# Altium PCB Opioid - rev.A0.PcbDoc
Units mm, origin at the board's own origin, x right, y up, seen from the top; angles counter-clockwise.
Board outline 35 x 35.1 mm, 2 copper layers (Top Layer, Bottom Layer), stack 0.871 mm thick; 51 components, 56 nets, 257 pads, 138 vias.
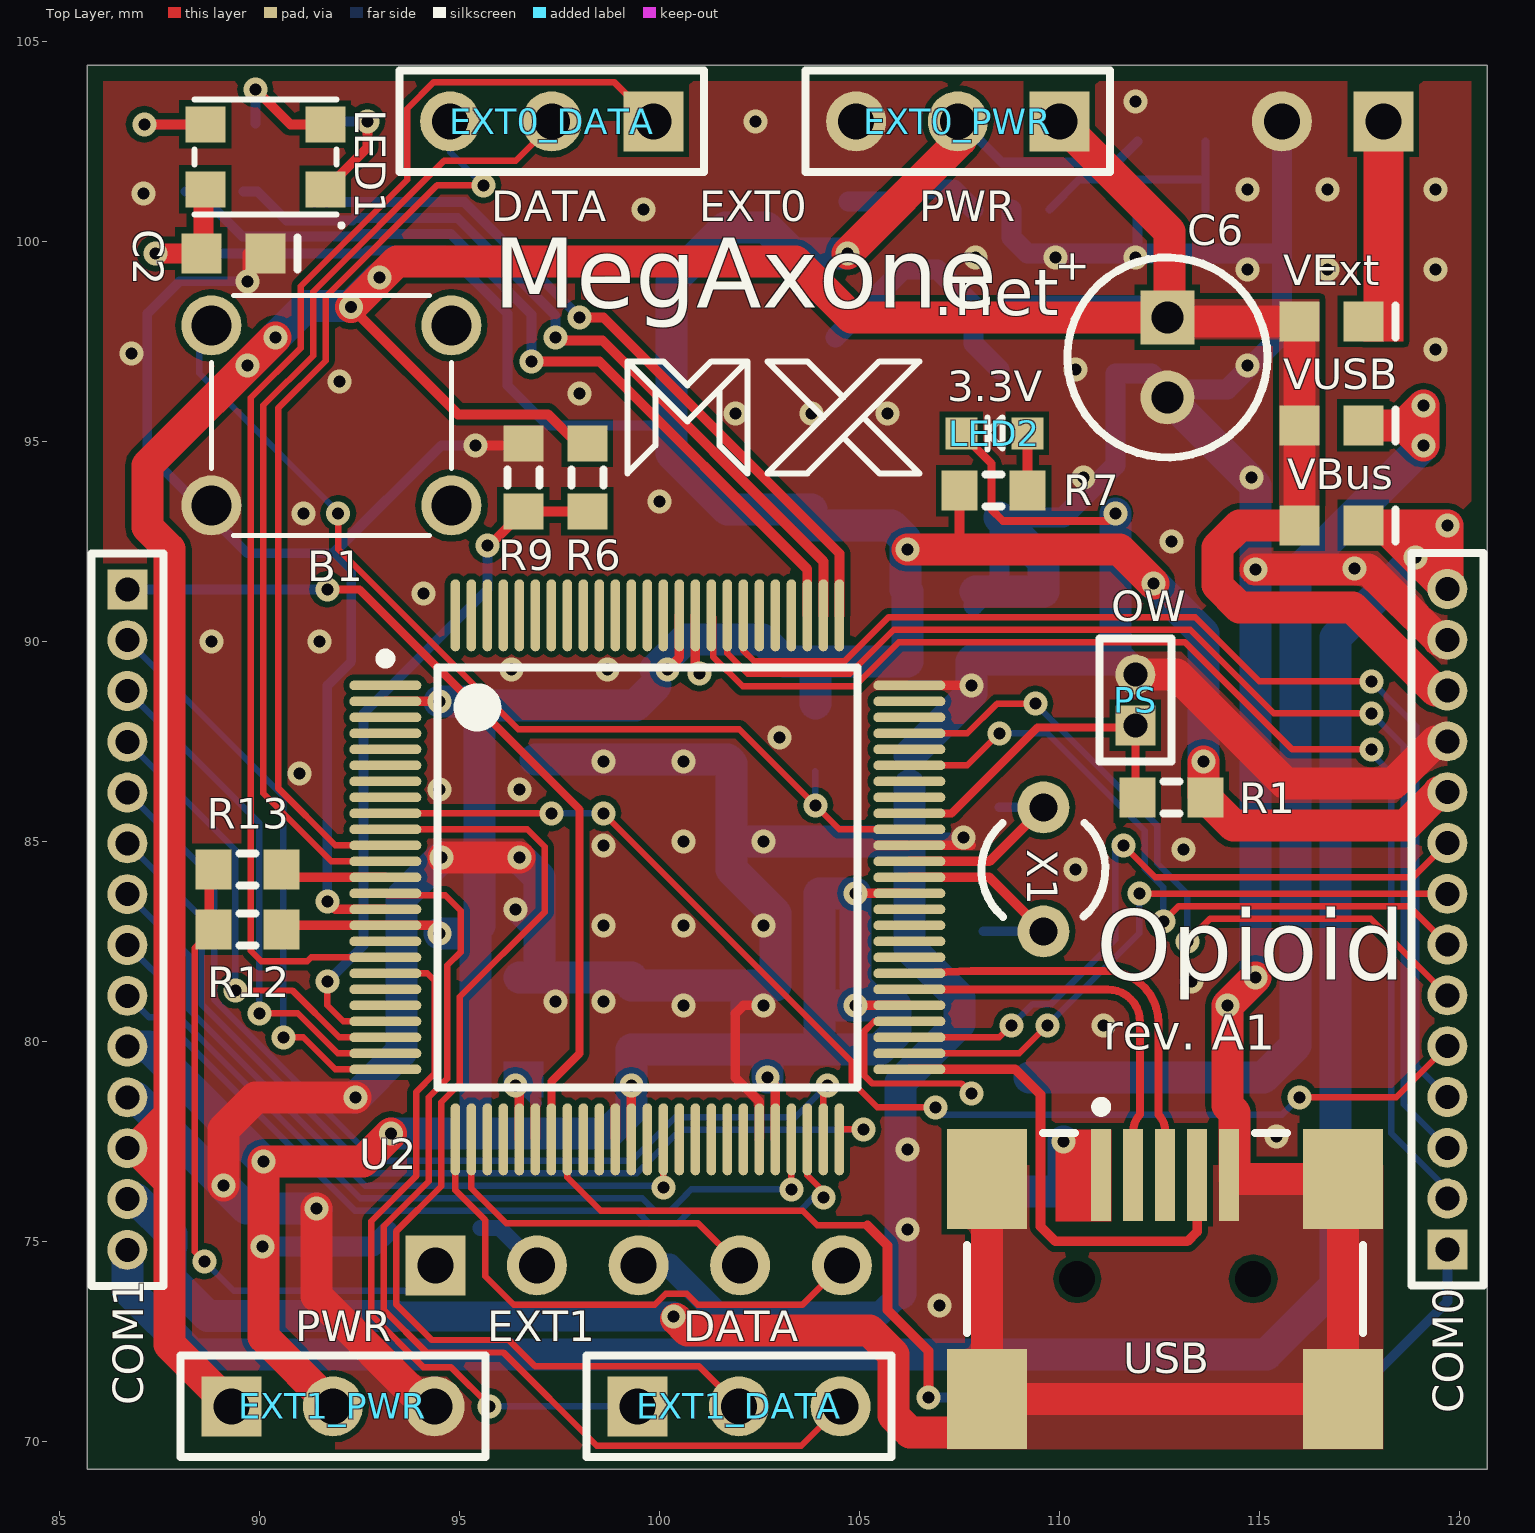
[diagram p0: Top Layer view]
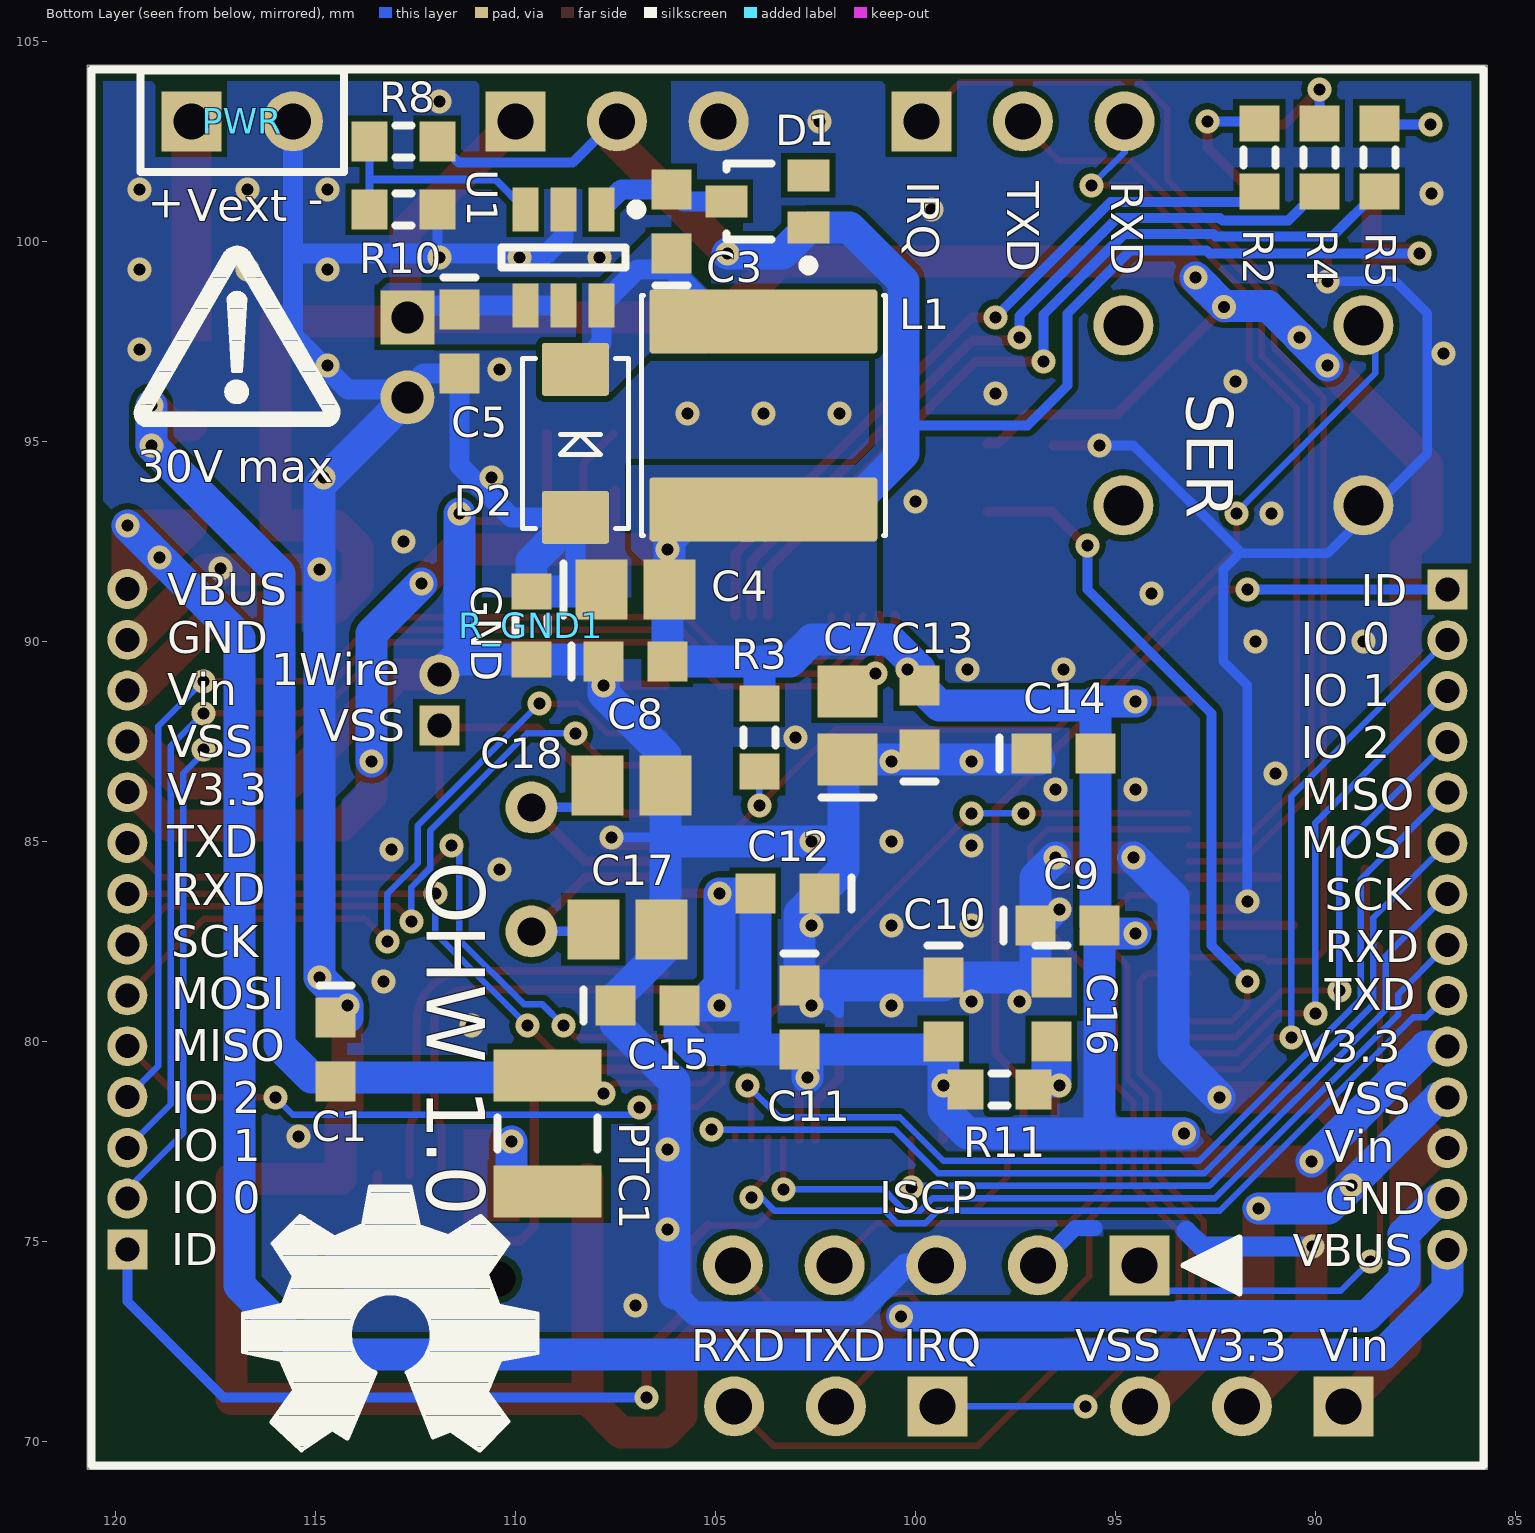
[diagram p1: Bottom Layer view, seen from below]

## Layer stack, top to bottom
Top Layer: signal copper 0.0356
Dielectric: core 0.8, FR-4, Dk 4.8
Bottom Layer: signal copper 0.0356

## Board outline
120.7,69.3 120.7,104.4 85.7,104.4 85.7,69.3

## Design rules (kind name [scope] priority, off if disabled: settings)
Clearance [All] p1: gap=0.152
DiffPairsRouting [All] p1: maxlimit=0.254 minlimit=0.254 mostfreqgap=0.254 maxuncoupledlength=12.7
HoleSize [All] p1: absolutevalues=TRUE maxlimit=6.3 minlimit=0.3 maxpercent=80.000 minpercent=20.000
HoleToHoleClearance [All] p1: gap=0.152 allowstackedmicrovias=TRUE
MinimumSolderMaskSliver [All] p1: minsoldermaskwidth=0.1
PlaneConnect [All] p1: planeconnectstyle=Direct reliefexpansion=0.508 reliefentries=4 reliefconductorwidth=0.254 reliefairgap=0.254
PolygonConnect [All] p1: connectstyle=Direct reliefconductorwidth=0.254 reliefentries=4 polygonreliefangle="90 Angle"
RoutingVias [All] p1: holewidth=3 width=0.6 viastyle="Through Hole" minholewidth=0.3 minwidth=0.6 maxholewidth=6.3 maxwidth=7
SilkToSilkClearance [All] p1: silktosilkclearance=0.1
SilkscreenOverComponentPads [All] p1: minsilkscreentomaskgap=0.1
SolderMaskExpansion TQFP [HasFootprint('TQFP-PT100_N')] p1: expansion=0.1
SolderMaskExpansion SolderMaskExpansion_1 [All] p2: expansion=0.05
Width [All] p1: maxlimit=12.7 minlimit=0.152 preferedwidth=0.152
21 further rules are at their usual default settings.

## Classes and differential pairs
component class uC: U2
component class Power: C3 C4 C5 C6 C7 C8 C9 C10 C11 C12 C13 C14 C15 C16 D1 D2 L1 LED2 R6 R7 R8 R9 R10 R11 R12 R13 R_GND1 U1 VBus VExt VUSB X1
component class IO: B1 C1 C2 COM0 COM1 EXT0_DATA EXT0_PWR EXT1_DATA EXT1_PWR LED1 PS PTC1 PWR R1 R2 R3 R4 R5
differential pair USB_D: +USB_D_P -USB_D_N

## Components (designator, comment, footprint, x,y, rotation, side; value= is the part's Value field where it differs from the comment)
B1 "Tact Button NO" "Tact TH 4pin 6×6mm" 88.3,93.4 r0 top
C1 "1µF" CAPC1608N 114.5,79.8 r270 bottom
C2 "1µF" CAPC1608N 89.35,99.7 r180 top
C3 "100nF" CAPC1608N 106.1,100.5 r90 bottom
C4 "10µF" CAPC2012N 107,91.3 r180 bottom
C5 "100nF" CAPC1608N 111.4,97.5 r270 bottom
C6 "33µF" CAPPR2-5x11 112.7,97.1 r270 top
C7 "10µF" CAPC2012N 101.7,87.9 r90 bottom
C8 "1µF" CAPC1608N 107,89.5 r180 bottom
C9 "100nF" CAPC1608N 96.2,82.9 r180 bottom
C10 "100nF" CAPC1608N 99.3,80.8 r270 bottom
C11 "100nF" CAPC1608N 102.9,80.6 r270 bottom
C12 "100nF" CAPC1608N 103.2,83.7 r0 bottom
C13 "100nF" CAPC1608N 99.9,88.1 r90 bottom
C14 "100nF" CAPC1608N 96.3,87.2 r180 bottom
C15 "100nF" CAPC1608N 106.7,80.9 r180 bottom
C16 "100nF" CAPC1608N 96.6,80.8 r270 bottom
COM0 "MHDR1X14" MHDR1X14 119.7,74.8 r90 top
COM1 "MHDR1X14" MHDR1X14 86.7,91.3 r270 top
D1 "Diode" SOT323 103.7,101 r90 bottom
D2 "Schottky Diode" DO-214AC 108.5,93.1 r270 bottom
EXT0_DATA "Header 3" HDR1X3 99.85,103 r180 top
EXT0_PWR "Header 3" HDR1X3 110,103 r180 top
EXT1_DATA "Header 3" HDR1X3 99.45,70.875 r0 top
EXT1_PWR "Header 3" HDR1X3 89.3,70.875 r0 top
L1 "15µH" "INDUCTOR 6×6mm Taiyo Yuden" 103.8,98 r270 bottom
LED1 "LED RGB common A" "LED 3528m" 91.4,102.9 r270 top
LED2 "" "LED 1608m" 109.2,95.2 r90 top
PS "MHDR1X2" MHDR1X2 111.9,87.9 r90 top
PTC1 "500mA" RESC3225N 109.2,77.7 r90 bottom
PWR "Header 2" HDR1X2 118.1,103 r180 bottom
R1 "4.7K" RESC1608N 112.8,86.1 r0 top
R2 "470" RESC1608N 91.4,102.1 r270 bottom
R3 "100K" RESC1608N 103.9,87.6 r90 bottom
R4 "330" RESC1608N 89.9,102.1 r270 bottom
R5 "330" RESC1608N 88.4,102.1 r270 bottom
R6 "10K" RESC1608N 98.2,94.1 r90 top
R7 "330" RESC1608N 108.359,93.766 r0 top
R8 "30.9K" RESC1608N 112.8,102.5 r180 bottom
R9 "1K" RESC1608N 96.6,94.1 r270 top
R10 "10K" RESC1608N 112.8,100.8 r0 bottom
R11 "10" RESC1608N 97.9,78.8 r0 bottom
R12 "150K" RESC1608N 89.7,82.8 r0 top
R13 "470" RESC1608N 89.7,84.3 r180 top
R_GND1 "0" RESC1608N 109.6,90.4 r270 bottom
U1 "MCP16301" SOT23-6_N 108.8,99.6 r270 bottom
U2 "PIC32MX575F256L" TQFP-PT100_N 99.7,84.1 r0 top
VBus "150" INDC1608N 116.8,92.9 r180 top
VExt "150" INDC1608N 116.8,98 r180 top
VUSB "150" INDC1608N 116.8,95.4 r180 top
X1 "Crystal" BCY-W2/D3.1 109.6,84.3 r0 top

## Footprints (in the part's own frame and the unit in brackets; to place one, negate y for a bottom-side part, rotate by r counter-clockwise, add the part's x,y. Pads: shape width x height; smd on the part's side, far side on the other; paste and mask are expansions set on the pad)
BCY-W2/D3.1 [mm] "Crystal, Thru-Hole; 2 Leads; Body 3.1 x 8.2 mm (Dia.xH)"
  round 1.3 hole 0.7: 1(0,1.55) 2(0,-1.55)
  silkscreen extent -1.55,-1.19 1.55,1.17
CAPC1608N [mm] "Chip Capacitor, Body 1.6x0.8mm, IPC Medium Density"
  rect 1x1 smd: 1(-0.8,0) 2(0.8,0)
  silkscreen extent -1.6,-0.4 -1.6,0.4, body extent -0.87,-0.48 0.87,0.48, height 0.85
CAPC2012N [mm] "Chip Capacitor, Body 2.0x1.3mm, IPC Medium Density"
  rect 1.3x1.5 smd: 1(-0.85,0) 2(0.85,0)
  silkscreen extent -1.8,-0.65 -1.8,0.65, body extent -1.1,-0.72 1.1,0.72, height 1.1
CAPPR2-5x11 [mm] "Capacitor, Electrolytic, Radial; Body 5 x 11 mm (Dia.xH typ); Pin Spacing 2 mm (typ)"
  rect 1.35x1.35 hole 0.8: 1(-1,0)
  round 1.35 hole 0.8: 2(1,0)
  silkscreen extent -2.5,-2.5 2.5,2.5
DO-214AC [mm] "DO-214AC Diode 4.25×2.65mm"
  rrect10% 1.32x1.68 smd: A(0,0) K(-3.7,0)
  silkscreen extent -3.98,-1.33 0.28,1.33, body extent -3.98,-1.33 0.28,1.33, height 2.15
HDR1X2 [mm] "Connector; Header; 2 Position"
  rect 1.5x1.5 hole 0.9: 1(0,0)
  round 1.5 hole 0.9: 2(2.54,0)
  silkscreen extent -1.27,-1.27 3.81,1.27
HDR1X3 [mm] "Connector; Header; 3 Position"
  rect 1.5x1.5 hole 0.9: 1(0,0)
  round 1.5 hole 0.9: 2(2.54,0) 3(5.08,0)
  silkscreen extent -1.27,-1.27 6.35,1.27
INDC1608N [mm] "Chip Inductor, Body 1.6x0.8mm, IPC Medium Density"
  rect 1x1 smd: 1(-0.8,0) 2(0.8,0)
  silkscreen extent -1.6,-0.4 -1.6,0.4, body extent -0.87,-0.48 0.87,0.48, height 0.71
"INDUCTOR 6×6mm Taiyo Yuden" [mm] "Inductor 6×6mm body Taiyo Yuden SMD Power"
  rrect10% 1.6x5.7 smd: 1(0,0) 2(4.7,0)
  silkscreen extent -0.65,-3.05 5.35,3.05, body extent -0.63,-2.99 5.35,2.99, height 2.8
"LED 1608m" [mm] "LED 1608 1.6x0.8mm"
  rect 0.8x0.8 smd: 1(0,0) 2(0,1.65)
  silkscreen extent -0.4,0.62 0.4,1, body extent -0.4,0.03 0.4,1.63, height 0.75
"LED 3528m" [mm] "LED RGB 3528m common A"
  rect 0.9x1 smd: 1(1.6,0.25) 2(1.6,-2.75) 3(-0.025,-2.75) 4(-0.025,0.25)
  silkscreen extent -0.65,-3.03 2.52,0.68, body extent -0.65,-3.03 2.22,0.53, height 1.9
MHDR1X2 [mm] "Connector; Header; 2 Position"
  rect 1x1 hole 0.6: 1(0,0)
  round 1 hole 0.6: 2(1.27,0)
  silkscreen extent -0.9,-0.9 2.17,0.9
MHDR1X14 [mm] "Connector; Header; 14 Position"
  rect 1x1 hole 0.6: 1(0,0)
  round 1 hole 0.6: 2(1.27,0) 3(2.54,0) 4(3.81,0) 5(5.08,0) 6(6.35,0) 7(7.62,0) 8(8.89,0) 9(10.16,0) 10(11.43,0) 11(12.7,0) 12(13.97,0) 13(15.24,0) 14(16.51,0)
  silkscreen extent -0.9,-0.9 17.41,0.9
RESC1608N [mm] "Chip Resistor, Body 1.6x0.8mm, IPC Medium Density"
  rect 0.9x1 smd: 1(-0.85,0) 2(0.85,0)
  silkscreen extent -0.2,-0.4 0.2,0.4, body extent -0.85,-0.48 0.85,0.48, height 0.6
RESC3225N [mm] "Chip Resistor, Body 3.2x2.5mm, IPC Medium Density"
  rect 1.3x2.7 smd: 1(-1.45,0) 2(1.45,0)
  silkscreen extent -0.4,-1.25 0.4,1.25, body extent -1.68,-1.32 1.68,1.32, height 0.71
SOT23-6_N [mm] "SOT23, 6-Leads, Body 2.9x1.6mm, Pitch 0.95mm, Lead Span 2.7mm, IPC Medium Density"
  rect 1.1x0.65 smd: 1(-1.2,0.95) 2(-1.2,0) 3(-1.2,-0.95) 4(1.2,-0.95) 5(1.2,0) 6(1.2,0.95)
  silkscreen extent -1.32,-1.55 0.25,1.95, body extent -0.9,-1.55 0.9,1.55, height 1.45
SOT323 [mm] "SOT-323/SC-70; 3 Leads; Body 2.2 x 2.2 mm, inc. leads (LxW max)"
  rect 0.8x1.05 smd: 1(-0.65,-1.025) 2(0.65,-1.025) 3(0,1.025)
  silkscreen extent -1.72,-1.15 0.95,1.03
"Tact TH 4pin 6×6mm" [mm] "Tactile push button TH 6×6mm body 4pin"
  round 1.5 hole 1: 1(0.5,0) 2(6.5,0) 3(0.5,4.5) 4(6.5,4.5)
  silkscreen extent 0.5,-0.75 6.5,5.25, body extent 0.5,-0.75 6.5,5.25, height 5.7
TQFP-PT100_N [mm] "Thin QFP, 100-Leads, Body 12x12mm, Pitch 0.4mm, IPC Medium Density"
  oval 1.8x0.24 smd: 1(-6.55,4.8) 2(-6.55,4.4) 3(-6.55,4) 4(-6.55,3.6) 5(-6.55,3.2) 6(-6.55,2.8) 7(-6.55,2.4) 8(-6.55,2) 9(-6.55,1.6) 10(-6.55,1.2) 11(-6.55,0.8) 12(-6.55,0.4) 13(-6.55,0) 14(-6.55,-0.4) 15(-6.55,-0.8) 16(-6.55,-1.2) 17(-6.55,-1.6) 18(-6.55,-2) 19(-6.55,-2.4) 20(-6.55,-2.8) 21(-6.55,-3.2) 22(-6.55,-3.6) 23(-6.55,-4) 24(-6.55,-4.4) 25(-6.55,-4.8) 51(6.55,-4.8) 52(6.55,-4.4) 53(6.55,-4) 54(6.55,-3.6) 55(6.55,-3.2) 56(6.55,-2.8) 57(6.55,-2.4) 58(6.55,-2) 59(6.55,-1.6) 60(6.55,-1.2) 61(6.55,-0.8) 62(6.55,-0.4) 63(6.55,0) 64(6.55,0.4) 65(6.55,0.8) 66(6.55,1.2) 67(6.55,1.6) 68(6.55,2) 69(6.55,2.4) 70(6.55,2.8) 71(6.55,3.2) 72(6.55,3.6) 73(6.55,4) 74(6.55,4.4) 75(6.55,4.8)
  oval 0.24x1.8 smd: 26(-4.8,-6.55) 27(-4.4,-6.55) 28(-4,-6.55) 29(-3.6,-6.55) 30(-3.2,-6.55) 31(-2.8,-6.55) 32(-2.4,-6.55) 33(-2,-6.55) 34(-1.6,-6.55) 35(-1.2,-6.55) 36(-0.8,-6.55) 37(-0.4,-6.55) 38(0,-6.55) 39(0.4,-6.55) 40(0.8,-6.55) 41(1.2,-6.55) 42(1.6,-6.55) 43(2,-6.55) 44(2.4,-6.55) 45(2.8,-6.55) 46(3.2,-6.55) 47(3.6,-6.55) 48(4,-6.55) 49(4.4,-6.55) 50(4.8,-6.55) 76(4.8,6.55) 77(4.4,6.55) 78(4,6.55) 79(3.6,6.55) 80(3.2,6.55) 81(2.8,6.55) 82(2.4,6.55) 83(2,6.55) 84(1.6,6.55) 85(1.2,6.55) 86(0.8,6.55) 87(0.4,6.55) 88(0,6.55) 89(-0.4,6.55) 90(-0.8,6.55) 91(-1.2,6.55) 92(-1.6,6.55) 93(-2,6.55) 94(-2.4,6.55) 95(-2.8,6.55) 96(-3.2,6.55) 97(-3.6,6.55) 98(-4,6.55) 99(-4.4,6.55) 100(-4.8,6.55)
  silkscreen extent -6.67,-5.25 5.25,5.59, body extent -6,-6 6,6, height 1.2

## Part data
C1 C2 C3 C4 C5 C7 C8 C9 C10 C11 C12 C13 C14 C15 C16: library part Capacitor
C6: library part "Capacitor Polarised"
COM0 COM1: "Header, 14-Pin"
EXT0_DATA EXT0_PWR EXT1_DATA EXT1_PWR: "Header, 3-Pin"
L1 VBus VExt VUSB: library part Inductor
LED2: library part LED
PS PWR: "Header, 2-Pin"
PTC1: library part PTC
R1 R2 R3 R4 R5 R6 R7 R8 R9 R10 R11 R12 R13 R_GND1: library part Resistor

## Free pads (board coordinates)
  rect 1.5x1.5 hole 0.9: 1(94.4,74.4)
  rect 1.3x1.5 smd far side: 1(107.95,86.4) 1(108.05,82.8) 2(106.25,86.4) 2(106.35,82.8)
  rect 0.5x2.3 smd: 1(111.046,76.664) 2(111.846,76.664) 3(112.646,76.664) 4(113.446,76.664) 5(114.246,76.664)
  round 1.5 hole 0.9: 2(96.94,74.4) 3(99.48,74.4) 4(102.02,74.4) 5(104.56,74.4)
  rect 2x2.5 smd: 6(117.096,76.564) 7(117.096,71.064) 8(108.196,76.564) 9(108.196,71.064)
  round 0.6 hole 0.9 unplated: MH1(114.846,74.064) MH2(110.446,74.064)

## Via types
v1: diameter 0.6, hole 0.3, Top Layer to Bottom Layer, tented both sides, 138 vias

## Nets (pads, with @x,y where several pads share a name; then routed paths per layer and width w, separated by ;. In a path a pad name is that pad's centre, name@x,y a point inside that pad or via, vN(x,y) a via of type N, cw(c..) or ccw(c..) an arc to the next point about the centre after c; other vN are vias at no path point)
GND: C1.1 C4.1 C5.2 C6.2 COM0.13 COM1.13 D2.A pad.5@114.246,76.664 pad.6 pad.7 pad.8 pad.9 PWR.2 R10.1 R_GND1.1 U1.2 | length 107
  Top Layer w0.8: v1@100.422,73.058 100.705,72.775 105.25,72.775 105.852,72.173 105.852,70.642 106.27,70.225 107.357,70.225 pad.9 ; pad.8 pad.9 ; v1(114.9,81.6) v1(114.2,80.9) 114.2,78.4 114.375,78.225 114.375,76.564 pad.6 pad.7 pad.9 ; v1(114.9,91.8) 117.722,91.8 119.482,90.04 COM0.13
  Bottom Layer w0.25: v1@111.95,99.75 R10.1
  Bottom Layer w0.5: C4.1@107.85,90.9 108.2,91.25 108.5,91.55 D2.A 110.1,93.1 111.4,94.4 C5.2 112.3,96.7 112.7,96.3 114.2,96.3 115.56,97.66 115.56,99.7 ; U1.2 108.8,100.1 109.2,99.7 115.56,99.7 ; PWR.2@115.56,102.9 115.56,99.7
  Bottom Layer w0.75: 93.389,73.13 93.396,73.123 v1(100.357,73.123)
  Bottom Layer w0.8: COM1.13 86.918,76.06 87.8,75.178 87.8,74.88 87.773,74.853 87.773,74.074 88.717,73.13 93.389,73.13 ; C4.1@107.9,91.25 108.2,91.25 R_GND1.1 109.6,92 D2.A ; C6.2 114.9,93.9 v1(114.9,91.8) v1(114.9,81.6) v1(114.2,80.9) C1.1@114.2,80.6
  other v1: 117.375,91.825 112.8,92.5 110.6,94.1 114.8,94.1 101.9,95.7 103.8,95.7 105.7,95.7 110.4,96.8 114.7,96.9 119.4,97.3 114.7,99.3 116.7,99.3 119.4,99.3 107.9,99.6 109.9,99.6 111.9,99.6 114.7,101.3 116.7,101.3 119.4,101.3 111.9,103.5
NetB1_2: B1.3 R3.1 U2.66 | length 25.1
  Top Layer w0.16: v1(91.972,93.2) 91.972,92.3 96.472,87.8 102,87.8 v1(103.9,85.9) 104.5,85.3 U2.66
  Bottom Layer w0.16: B1.3@88.5,97.9 88.5,96.7 91.972,93.228 v1(91.972,93.2) ; v1(103.9,85.9) R3.1
NetC3_1: C3.1 D2.K L1.1 U1.6 | length 6.4
  Bottom Layer w0.5: L1.1@104.4,97.6 106.1,99.3 106.95,99.3 U1.6 107.85,97.45 D2.K
NetC3_2: C3.2 D1.3 U1.1 | length 3.5
  Bottom Layer w0.5: D1.3 105.8,101 C3.2 107.35,101.3 U1.1
NetC7_2: C7.2 U2.85 | length 1.5
  Top Layer w0.24: U2.85 100.9,89.3 v1(101,89.2)
NetC16_2: C16.2 R11.1 U2.30 | length 2
  Top Layer w0.24: U2.30 v1@96.5,78.9
  Bottom Layer w0.24: v1@96.5,78.9 R11.1@96.95,78.45
  other v1: 96.4,78.9
NetC17_1: pad.1@108.05,82.8 U2.63 X1.2 | length 5.4
  Top Layer w0.24: U2.63 108.25,84.1 X1.2
  Bottom Layer w0.24: pad.1@108.1,82.75 X1.2
NetC18_1: pad.1@107.95,86.4 U2.64 X1.1 | length 5
  Top Layer w0.24: U2.64 108.25,84.5 X1.1
  Bottom Layer w0.24: pad.1@108.5,85.85 X1.1
NetCOM0_1: COM0.1 U2.33 | length 29.3
  Top Layer w0.16: U2.33 97.7,76.6 98.532,75.768 103.582,75.768 103.95,75.4 105.2,75.4
  Top Layer w0.25: 105.2,75.4 105.7,74.9 105.7,73.283 106.725,72.258 106.725,71.225 v1@106.6,71.1
  Bottom Layer w0.25: v1@106.6,71.1 v1(106.725,71.1) 117.3,71.1 119.7,73.5 COM0.1
NetCOM0_2: COM0.2 U2.84 | length 31.4
  Top Layer w0.16: U2.84 101.348,90.602 101.348,89.611 102.083,88.875 104.887,88.875 105.987,89.975 113.141,89.975 115.816,87.3 v1(117.8,87.3)
  Bottom Layer w0.16: v1@117.7,87.3 118.3,86.7 118.3,77.704 119.7,76.304 COM0.2
NetCOM0_3: COM0.3 U2.83 | length 30.2
  Top Layer w0.16: U2.83 101.7,89.7 102.212,89.188 104.758,89.188 105.858,90.288 113.271,90.288 115.358,88.2 v1(117.8,88.2)
  Bottom Layer w0.16: v1(117.8,88.2) 118.612,87.388 118.612,78.428 COM0.3
NetCOM0_4: COM0.4 U2.82 | length 29
  Top Layer w0.16: U2.82 102.1,89.772 102.372,89.5 104.628,89.5 105.728,90.6 113.4,90.6 115,89 v1(117.8,89)
  Bottom Layer w0.16: v1(117.8,89) 118.925,87.875 118.925,79.385 COM0.4
NetCOM0_5: COM0.5 U2.9 | length 30.7
  Top Layer w0.16: U2.9 v1(97.3,85.7) ; v1(98.6,85.7) 104.805,79.495 104.805,78.995 105.45,78.35 v1(106.9,78.35) ; v1(116,78.6) 118.42,78.6 COM0.5
  Bottom Layer w0.16: v1(97.3,85.7) v1(98.6,85.7) ; v1(106.9,78.35) 107.082,78.168 115.568,78.168 v1(116,78.6)
NetCOM0_6: COM0.6 U2.72 | length 18.5
  Top Layer w0.16: U2.72 107.7,87.7 108.442,88.442 v1(109.4,88.442) ; v1(113.2,82.5) 113.765,83.065 117.785,83.065 COM0.6
  Bottom Layer w0.16: v1(109.4,88.442) 112.445,85.397 112.445,84.45 113.2,83.695 v1(113.2,82.5)
NetCOM0_7: COM0.7 U2.70 | length 17.3
  Top Layer w0.16: U2.70 107.7,86.9 v1(108.5,87.7) ; v1(112.6,83) 112.978,83.378 118.742,83.378 COM0.7
  Bottom Layer w0.16: v1(108.5,87.7) 109.7,87.7 112.132,85.268 112.132,84.321 112.6,83.853 v1(112.6,83)
NetCOM0_8: COM0.8 U2.52 | length 16
  Top Layer w0.16: U2.52 109,79.7 v1@109.6,80.3 ; v1@109.5,80.3 v1@109.6,80.3 ; v1(109.7,80.4) v1@109.6,80.3 ; v1@109.8,80.3 v1@109.6,80.3 ; v1@112.01,83.69 COM0.8
  Bottom Layer w0.16: v1(109.7,80.4) 112,82.7 v1(112,83.7)
NetCOM0_9: COM0.9 U2.53 | length 17.4
  Top Layer w0.16: U2.53 108.5,80.1 v1(108.8,80.4) ; v1(111.6,84.9) 112.4,84.1 118.84,84.1 COM0.9
  Bottom Layer w0.16: v1(108.8,80.4) 109.332,80.932 109.791,80.932 111.4,82.542 v1@111.4,85
NetCOM1_1: COM1.1 U2.32 | length 22.2
  Top Layer w0.16: U2.32 U2.32@97.325,77.575
  Top Layer w0.2: v1(91.7,91.3) 92.502,91.3 98,85.802 98,79.7 97.3,79 U2.32
  Bottom Layer w0.25: COM1.1 v1(91.7,91.3)
NetCOM1_2: COM1.2 U2.25 | length 14.4
  Top Layer w0.16: v1(90.6,80.1) 91.1,80.1 91.9,79.3 U2.25
  Bottom Layer w0.16: COM1.2 90.6,86.13 v1(90.6,80.1)
NetCOM1_3: COM1.3 U2.24 | length 13
  Top Layer w0.16: v1(90,80.7) 90.958,80.7 91.958,79.7 U2.24
  Bottom Layer w0.16: COM1.3 90,85.46 v1(90,80.7)
NetCOM1_4: COM1.4 U2.23 | length 11.6
  Top Layer w0.16: v1(89.4,81.272) 90.828,81.272 92,80.1 U2.23
  Bottom Layer w0.16: COM1.4 89.4,84.79 v1(89.4,81.272)
NetCOM1_5: COM1.5 U2.49 | length 25.1
  Top Layer w0.16: U2.49 v1@104.1,78.802
  Bottom Layer w0.16: COM1.5 88.868,84.052 88.868,81.052 92.907,77.012 99.307,77.012 100.394,78.1 103.398,78.1 v1(104.2,78.902)
NetCOM1_6: COM1.6 U2.50 | length 24.6
  Top Layer w0.16: U2.50 104.5,77.8 v1(105.1,77.8)
  Bottom Layer w0.16: COM1.6 88.555,83.095 88.555,80.922 92.778,76.7 99.436,76.7 100.524,77.788 105.088,77.788 v1(105.1,77.8) v1@105.1,78
NetCOM1_7: COM1.7 U2.39 | length 18.5
  Top Layer w0.16: v1@100.1,76.3 U2.39
  Bottom Layer w0.16: COM1.7 88.243,82.137 88.243,80.793 92.648,76.388 100.012,76.388 v1@100.1,76.3
  other v1: 100.1,76.35
NetCOM1_8: COM1.8 U2.47 | length 21.1
  Top Layer w0.16: v1(103.3,76.3) U2.47
  Bottom Layer w0.16: COM1.8 87.93,81.18 87.93,80.664 92.519,76.075 99.572,76.075 99.879,75.768 100.271,75.768 100.632,76.129 100.632,76.132 100.8,76.3 v1(103.3,76.3)
NetCOM1_9: COM1.9 U2.48 | length 21.5
  Top Layer w0.16: U2.48@103.668,77.582 U2.48 103.7,76.653 v1@104.1,76.253
  Bottom Layer w0.16: COM1.9 87.24,80.6 87.552,80.6 92.389,75.763 99.442,75.763 99.75,75.455 100.455,75.455 100.768,75.768 103.521,75.768 103.853,76.1 v1(104.1,76.1)
NetCONN1_1: pad.1@111.046,76.664 PTC1.1 | length 2.1
  Bottom Layer w0.8: PTC1.1 110.05,76.25 110.1,76.3 v1(110.1,77.5)
NetCONN1_4: pad.4@113.446,76.664 U2.51 | length 12.4
  Top Layer w0.24: U2.51 108.9,79.3 109.528,78.672 109.528,75.372 109.9,75 113.2,75 113.446,75.246 pad.4@113.446,76.664
NetEXT0_DATA_1: EXT0_DATA.1 U2.18 | length 33
  Top Layer w0.16: U2.18 91.3,82.1 91.2,82 90.05,82 89.788,82.262 89.788,96.088 91.032,97.332 91.032,98.874 93.7,101.542 93.7,103.319 94.363,103.982 98.868,103.982 EXT0_DATA.1
NetEXT0_DATA_2: EXT0_DATA.2 U2.12 | length 24.6
  Top Layer w0.16: U2.12 91.8,84.5 90.1,86.2 90.1,95.9 91.345,97.145 91.345,98.745 94.618,102.018 96.408,102.018 EXT0_DATA.2@97.39,103
NetEXT0_DATA_3: EXT0_DATA.3 U2.11 | length 23.1
  Top Layer w0.16: U2.11 91.9,84.9 90.468,86.332 90.468,95.826 91.657,97.015 91.657,98.615 94.442,101.4 v1(95.6,101.4)
  Bottom Layer w0.16: EXT0_DATA.3 94.77,102.23 v1(95.6,101.4)
NetEXT1_DATA_1: EXT1_DATA.1 U2.19 | length 18
  Top Layer w0.16: U2.19 94.2,81.7 94.388,81.512 94.388,79.2 93.923,78.735 93.923,76.635 92.793,75.505 92.793,73.165 94.101,71.857 94.787,71.857 95.794,70.85 v1@95.8,70.85
  Bottom Layer w0.16: v1(95.75,70.875) EXT1_DATA.1
NetEXT1_DATA_2: EXT1_DATA.2 U2.10 | length 26.8
  Top Layer w0.16: U2.10 96.694,85.3 97.132,84.862 97.132,83.232 95.012,81.112 95.012,78.941 94.548,78.476 94.548,76.376 93.418,75.246 93.418,73.424 94.308,72.533 96.233,72.533 96.892,71.875 100.99,71.875 EXT1_DATA.2
NetEXT1_DATA_3: EXT1_DATA.3 U2.14 | length 26.1
  Top Layer w0.16: U2.14 93.198,83.652 94.648,83.652 95.032,83.268 95.032,82.232 94.7,81.9 94.7,79.07 94.235,78.605 94.235,76.506 93.105,75.376 93.105,73.295 94.179,72.221 96.104,72.221 98.432,69.893 103.548,69.893 EXT1_DATA.3
NetICSP_1: pad.1@94.4,74.4 R12.1 R13.2 | length 16.4
  Top Layer w0.16: v1(88.625,74.5) 88.385,74.74 88.385,82.335 R12.1
  Top Layer w0.24: R12.1@88.75,82.8 R13.2@88.75,84.3
  Bottom Layer w0.16: v1(88.625,74.5) 89.363,73.762 93.651,73.762 93.663,73.75 93.75,73.75 pad.1@94.4,74.4
NetICSP_4: pad.5@104.56,74.4 U2.26 | length 13.6
  Top Layer w0.16: U2.26 94.9,76.283 95.65,75.533 95.65,74.125 96.357,73.418 99.887,73.418 100.16,73.69 100.684,73.69 100.957,73.418 103.578,73.418 pad.5@104.56,74.4
NetICSP_5: pad.4@102.02,74.4 U2.27 | length 8.7
  Top Layer w0.16: U2.27 95.3,76.325 96.17,75.455 100.965,75.455 pad.4@102.02,74.4
NetLED1_KB: LED1.3 R5.1 | length 2.3
  Top Layer w0.25: v1(87.125,102.925) 88.15,102.925
  Bottom Layer w0.25: v1(87.125,102.925) R5.1@88.375,102.925
NetLED1_KG: LED1.4 R4.1 | length 3
  Top Layer w0.25: v1(89.9,103.8) 90.775,102.925 LED1.4
  Bottom Layer w0.25: R4.1 v1(89.9,103.8)
NetLED1_KR: LED1.1 R2.1 | length 3.2
  Top Layer w0.25: LED1.1 92.7,102.35 v1(92.7,103)
  Bottom Layer w0.25: R2.1@91.45,103 v1@92.5,103
NetLED2_A: LED2.1 R7.2 | length 1.4
  Top Layer w0.25: R7.2 LED2.1@109.209,95.191
NetPS_1: PS.1 R1.1 U2.67 | length 8.3
  Top Layer w0.2: U2.67 107.3,85.7 109.45,87.85 PS.1@111.9,87.85 ; R1.1@111.9,86.15 PS.1@111.9,87.85 ; PS.1 PS.1@111.9,87.85
NetR2_2: R2.2 U2.76 | length 18.7
  Top Layer w0.25: v1(98,98.1) 98.6,98.1 104.5,92.2 U2.76
  Bottom Layer w0.25: R2.2@91.375,100.975 91.385,100.985 95.123,100.985 98,98.107 v1(98,98.1) ; R2.2 R2.2@91.675,100.975
NetR4_2: R4.2 U2.77 | length 20
  Top Layer w0.25: v1(97.4,97.6) 97.477,97.523 98.577,97.523 104.098,92.002 U2.77@104.098,90.65
  Bottom Layer w0.25: R4.2@89.6,101.25 89.95,101.25 90.677,100.523 92.326,100.523 92.386,100.582 94.956,100.582 97.4,98.138 v1(97.4,97.6)
NetR5_2: R5.2 U2.78 | length 21.4
  Top Layer w0.24: U2.78@103.695,90.655 103.695,91.805
  Top Layer w0.25: v1(96.8,97) 98.5,97 103.695,91.805
  Bottom Layer w0.25: R5.2@88.15,101.25 R5.2@88.45,101.25 ; R5.2 R5.2@88.45,101.25 ; v1(96.8,97) 96.8,98.169 94.789,100.18 92.553,100.18 92.493,100.12 89.58,100.12 R5.2@88.45,101.25
NetR6_1: R6.1 R9.2 U2.22 | length 17.6
  Top Layer w0.16: v1(91.7,81.5) 91.7,80.9 92.1,80.5 U2.22
  Top Layer w0.25: v1(95.7,92.4) 95.75,92.4 R9.2 R6.1
  Bottom Layer w0.25: v1(91.7,81.5) 92.6,82.4 92.6,88.2 95.7,91.3 v1(95.7,92.4)
NetR8_1: R8.1 R10.2 U1.3 | length 5.9
  Bottom Layer w0.2: U1.3 110.502,101.552 113.602,101.552 ; R10.2 R8.1
NetR13_1: R13.1 U2.13 | length 2.2
  Top Layer w0.24: R13.1@90.95,84.1 U2.13
USB_D_N: pad.2@111.846,76.664 U2.56 | length 10.1
  Top Layer w0.2: U2.56 107.8,81.3 109.31,81.3 111.2,81.3 cw(c111.2,80.481) 112.019,80.481 112.019,79.1 112.019,78.173 ccw(c112.437,77.755) 111.846,77.755 pad.2@111.846,76.664
USB_D_P: pad.3@112.646,76.664 U2.57 | length 10.8
  Top Layer w0.2: U2.57 107.8,81.754 109.31,81.754 111.2,81.754 cw(c111.2,80.481) 112.473,80.481 112.473,79.1 112.473,78.173 cw(c112.055,77.755) 112.646,77.755 pad.3@112.646,76.664
V3.3: C2.2 C4.2 C8.2 C9.2 C10.2 C11.2 C12.2 C13.2 C14.2 C15.2 COM0.10 COM1.10 D1.1 EXT0_PWR.2 EXT1_PWR.2 L1.2 LED1.2 pad.2@96.94,74.4 R1.2 R3.2 R7.1 R8.2 R11.2 R12.2 U2.2 U2.16 U2.37 U2.46 U2.55 U2.62 U2.86 | length 150.4
  Top Layer w0.24: R12.2@90.55,82.9 U2.16 v1@94.5,82.9 ; U2.2 v1(94.5,88.5) ; U2.37 v1(99.3,78.9) ; v1(100.2,89.3) 100.5,89.6 U2.86 ; v1(102.7,79.1) 102.9,78.9 U2.46 ; v1(104.9,80.9) U2.55 ; v1(104.9,83.7) U2.62
  Top Layer w0.25: 107.509,92.309 R7.1
  Top Layer w0.5: v1(87.4,99.7) C2.2 ; C2.2@88.6,99.6 LED1.2@88.6,100.95
  Top Layer w0.8: EXT1_PWR.2 90.1,72.615 v1(90.1,77) 92.59,77 v1(93.29,77.7) ; v1(104.7,99.7) 107.54,102.54 EXT0_PWR.2@107.54,103 ; v1(106.2,92.3) 111.5,92.3 v1(112.35,91.45) ; R1.2@113.6,86.15 v1(113.6,87) ; R1.2 114.35,85.4 118.652,85.4 119.482,86.23 COM0.10
  Bottom Layer w0.24: C9.2 C9.2@95.5,82.9 ; v1@99.3,78.75 v1(99.3,78.9)
  Bottom Layer w0.25: v1(87.4,99.7) 92.642,99.7 92.719,99.777 94.623,99.777 96.2,98.2 96.2,96.4 97.2,95.4 100.3,95.4 ; EXT0_PWR.2@107.54,103 108.567,101.973 111.423,101.973 R8.2
  Bottom Layer w0.4: 95.525,75.33 96.01,75.33 pad.2@96.94,74.4
  Bottom Layer w0.5: v1(90.075,74.875) 92.842,74.875 93.221,75.254
  Bottom Layer w0.8: COM1.10 87.23,79.87 v1(90.1,77) ; v1(93.29,77.7) 98.7,77.7 99.3,78.3 v1@99.3,78.75 ; v1(94.5,82.7) C9.2@95.302,82.7 ; v1(94.5,88.5) 95.5,88.5 ; 95.4,77.7 C9.2 ; C9.2@95.5,82.898 95.5,82.9 95.5,88.5 ; v1(99.3,78.9) 99.3,79.8 C11.2 104,79.8 ; C13.2 99.4,88.4 95.6,88.4 95.5,88.5 ; C13.2@99.9,89.3 99.9,89.305 100.647,90.052 102.579,90.052 103.131,89.5 C8.2 C4.2@106.2,91.25 ; v1(102.7,79.1) C11.2@102.7,79.6 ; L1.2@103.8,92.9 105.8,92.9 106.15,92.55 C4.2 ; L1.2 101.7,93.3 100.3,94.7 100.3,95.4 100.3,99 101.65,100.35 D1.1 103.325,99.7 v1(104.7,99.7) ; R3.2 103.9,89.4 ; 104,80.9 C15.2@105.4,80.9 ; v1(112.35,91.45) 113.6,90.2 v1(113.6,87) ; 104,79.8 C12.2 v1(104.9,83.7) 104.9,81.4 C15.2@105.4,80.9 ; 104,79.8 105.5,79.8 105.9,80.2 C15.2 C15.2@105.4,80.9
VBUS: COM0.14 COM1.14 VBus.1 | length 59.2
  Top Layer w0.8: v1(118.9,92.1) v1(119.7,92.9) ; COM0.14@119.6,91.4 118.1,92.9 v1(119.7,92.9) ; COM0.14 v1(119.7,92.9)
  Bottom Layer w0.8: COM1.14 86.7,73.8 88.323,72.177 115.177,72.177 116.9,73.9 116.9,90.1 v1(118.9,92.1) v1(119.7,92.9)
VEXT: PWR.1 VExt.1 | length 4.9
  Top Layer w0.8: 118.1,98 PWR.1@118.1,102.9
VIN: C5.1 C6.1 COM0.12 COM1.12 EXT0_PWR.1 EXT1_PWR.1 R6.2 U1.4 U1.5 VBus.2 VExt.2 VUSB.2 | length 92.9
  Top Layer w0.25: v1(92.29,98.353) 94.966,95.677 97.215,95.677 97.942,94.95 98.033,94.95 R6.2
  Top Layer w0.8: COM1.12 COM1.12@86.918,77.33 ; EXT1_PWR.1 87.752,72.423 87.752,76.496 ; v1(90.4,97.6) 87.198,94.398 87.198,92.861 87.752,92.306 87.752,78.164 ; v1(92.29,98.353) 93.436,99.5 103.4,99.5 104.8,98.1 C6.1 112.752,98.152 C6.1@112.752,98.248 ; EXT0_PWR.1 112.752,100.248 C6.1@112.752,98.248 ; C6.1@112.7,98.3 C6.1@112.752,98.248 ; COM0.12 119.405,88.77 117.327,90.848 114.506,90.848 113.948,91.406 113.948,92.348 114.5,92.9 VBus.2 VUSB.2 VExt.2 113,98 C6.1@112.752,98.248 ; COM1.12@86.918,77.33 87.752,76.496 ; COM1.12@86.918,77.33 87.752,78.164 ; 87.752,76.496 87.752,78.164
  Bottom Layer w0.5: U1.5 U1.4 C6.1@112.6,98.4
  Bottom Layer w0.8: v1(89.7,96.9) 91.19,98.39 92.29,98.39 v1(93,99.1)
VSS: B1.1 C2.1 C7.1 C8.1 C9.1 C10.1 C11.1 C12.1 C13.1 C14.1 C15.1 C16.1 COM0.11 COM1.11 EXT0_PWR.3 EXT1_PWR.3 LED2.2 pad.2@106.25,86.4 pad.2@106.35,82.8 pad.3@99.48,74.4 PS.2 R9.1 R_GND1.2 U2.15 U2.31 U2.36 U2.45 U2.65 U2.75 | length 137.8
  Top Layer w0.2: LED2.2 108.3,94.45 108.3,93.3 108.586,93.014 111.214,93.014 v1(111.4,93.2)
  Top Layer w0.24: v1(89.7,99) C2.1@89.7,99.7 ; v1(91.7,83.5) 91.9,83.3 U2.15 ; U2.45 102.5,78.491 101.9,79.091 101.9,80.7 102.1,80.9 v1(102.6,80.9) ; U2.65 v1@107.4,84.9 ; U2.75 v1(107.8,88.9) ; v1(107.6,85.1) v1@107.4,84.9 ; v1@107.792,84.9 v1@107.4,84.9
  Top Layer w0.25: v1(95.4,94.9) R9.1@96.55,94.9
  Top Layer w0.8: v1(89.1,76.4) 89.1,77.8 89.9,78.6 v1(92.4,78.6) ; v1(91.425,75.825) 91.425,73.639 94.189,70.875 EXT1_PWR.3 ; v1@94.602,84.6 v1(96.5,84.6) ; PS.2 112.93,89.17 115.652,86.448 118.352,86.448 119.405,87.5 COM0.11
  Bottom Layer w0.24: v1(89.7,99) 88,99 87.2,98.2 87.2,94.7 88.5,93.4 89.7,92.2 91.9,92.2 ; v1(91.7,83.5) 91.7,88.9 92.3,89.5 92.3,91.8 91.9,92.2 ; 91.874,92.226 91.9,92.2 ; v1(96.4,83.3) C9.1@96.6,83.3 ; 101.9,81.4 101.9,80.7 102.1,80.9 v1(102.6,80.9) ; 106.35,85.1 v1(107.6,85.1)
  Bottom Layer w0.25: 91.874,92.226 94.547,94.9 v1(95.4,94.9)
  Bottom Layer w0.6: v1(96.4,83.3) C9.1@96.8,82.9 ; pad.3@99.48,74.4 100.25,74.4 101.452,73.198 105.523,73.198 106.025,73.7
  Bottom Layer w0.8: COM1.11 86.918,78.6 89.1,76.418 v1(89.1,76.4) 89.675,75.825 v1(91.425,75.825) ; v1(92.4,78.6) 93.548,79.748 93.548,83.6 v1(94.548,84.6) ; C16.1@96.5,81.6 C10.1 ; v1(96.5,84.6) 97,84.1 C9.1 C16.1@97,81.9 ; C14.1@96.9,87.05 C7.1 101.8,86.95 101.8,84.3 C12.1 102.9,83.2 C11.1 101.9,81.4 C10.1@99.3,81.4 ; 101.9,85 v1(102.6,85) 106.25,85 ; 106.025,73.7 106.025,78.978 107.5,80.453 C15.1 107.5,81.081 106.25,82.331 106.25,85 ; pad.2@106.25,86.4 106.25,85 ; pad.2@106.25,87.15 107.8,88.7 C8.1 ; C8.1@107.85,89.5 107.85,89.55 R_GND1.2 111.52,89.55 ; v1@111.398,93.2 111.398,89.672 111.52,89.55 ; PS.2 111.52,89.55
  other v1: 107,73.4 106.2,75.3 106.2,77.3 115.425,77.625 111.1,80.4 100.6,80.9 97.4,81 98.6,81 113.3,81.5 98.6,82.9 100.6,82.9 102.6,82.9 110.4,84.3 113.1,84.8 98.6,84.9 100.6,85 94.5,86.3 96.5,86.3 91,86.7 98.6,87 100.6,87 103,87.6 96.3,89.3 98.7,89.3 88.8,90 91.5,90 94.1,91.2 91.1,93.2 100,93.5 98,96.2 92,96.5 86.8,97.2 99.6,100.8 87.1,101.2 102.4,103
VUSB: C1.2 PTC1.2 U2.54 VUSB.1 | length 32.4
  Top Layer w0.16: U2.54 105.372,80.5 105.118,80.246 105.118,79.154 105.324,78.948 107.552,78.948 v1(107.8,78.7)
  Top Layer w0.8: VUSB.1@118.1,95.4 118.6,95.4 ; 118.6,95.4 v1(119.1,95.9) v1(119.1,94.9) 118.6,95.4
  Bottom Layer w0.8: PTC1.2@109.25,79.1 115.1,79.1 115.9,79.9 115.9,91.7 v1(119.1,94.9) v1(119.1,95.9)
pads on no net: B1.2 B1.4 D1.2 U2.1 U2.3 U2.4 U2.5 U2.6 U2.7 U2.8 U2.17 U2.20 U2.21 U2.28 U2.29 U2.34 U2.35 U2.38 U2.40 U2.41 U2.42 U2.43 U2.44 U2.58 U2.59 U2.60 U2.61 U2.68 U2.69 U2.71 U2.73 U2.74 U2.79 U2.80 U2.81 U2.87 U2.88 U2.89 U2.90 U2.91 U2.92 U2.93 U2.94 U2.95 U2.96 U2.97 U2.98 U2.99 U2.100

## Polygon pours and split planes (outlines as drawn)
VSS on Bottom Layer "Top Layer-No Net" (solid, remove dead copper, pour order 8): 95.9,88.9 95.5,88.5 95.4,88.4 95.4,77.7 98.7,77.7 99.3,78.3 99.3,79.8 102.9,79.8 106.9,79.8 106.9,80.3 107.5,80.9 106.25,82.15 106.25,86.4 106.25,87.35 107.8,88.9 107.85,88.95 107.85,89.55 106.25,89.55 106.2,89.5
VSS on Bottom Layer "Top Layer-No Net" (solid, remove dead copper, pour order 26): 95.6,75.763 96.94,74.423 96.94,74.4 96.94,73.183 97,73.123 100.357,73.123 100.357,72.22 100.4,72.177 100.423,72.2 107.6,72.2 107.6,78.168 108.8,79.368 108.8,80.4 105.9,80.4 105.9,80.2 105.5,79.8 99.6,79.8 99.6,78.3 98.8,77.5 95.6,77.5
VSS on Bottom Layer "Top Layer-No Net" (solid, remove dead copper, pour order 28): 107.85,89.55 111.148,89.55 111.4,89.802 111.4,91.4 112.3,91.4 112.35,91.45 113.6,90.2 113.6,87 114.7,85.9 114.7,81.4 114.2,80.9 114.2,79.1 109.25,79.1 109.2,79.15 109.2,79.9 112,82.7 112,83.1 113.2,83.1 113.2,83.695 112.445,84.45 112.445,85.397 110.142,87.7 107.8,87.7
V3.3 on Bottom Layer "Top Layer-No Net" (solid, remove dead copper, pour order 42): 103,100.5 103.6,99.9 104.5,99.9 104.7,99.7 105.1,99.7 105.1,98.7 101,98.7 101,94.9 101.5,94.4 107.1,94.4 107.1,92.3 106.8,92 106.2,91.4 106.2,89.5 100.5,89.5 100.4,89.6 100.9,90.1 100.9,93.8 100.8,93.8 100,94.6 100,99 101.5,100.5
V3.3 on Bottom Layer "Top Layer-No Net" (solid, remove dead copper, pour order 44): 95.7,80.5 96.6,80.5 96.6,79.1 97.1,78.6 97.2,78.5 98.9,78.5 98.9,80 103.8,80 103.8,83.8 103.9,83.9 105,83.9 105,81.7 105.6,81.1 106.2,81.1 106.2,80.2 105.6,79.6 104.1,78.1 100.394,78.1 99.307,77.012 92.907,77.012 92.319,77.6 93.119,78.4 95.3,78.4
VIN on Bottom Layer "Top Layer-No Net" (solid, remove dead copper, pour order 48): 108.475,98.95 108.475,97.55 108.6,97.425 112.025,97.425 113.375,98.775 113.2,98.95
NetC3_1 on Bottom Layer "Top Layer-No Net" (solid, remove dead copper, pour order 46): 107.825,98.95 106.6,100.175 106.6,100.2 105.6,100.2 105.6,99.2 105.175,98.775 105.175,97.2 106.65,97.2 107.675,96.175 108.325,96.925 108.325,98.95
VSS on Bottom Layer "Top Layer-No Net" (solid, remove dead copper, pour order 52): 107.6,72.7 115,72.7 116.4,74.1 116.4,78.7 116.1,78.7 116,78.6 115.568,78.168 107.6,78.168
VSS on Bottom Layer "Top Layer-No Net" (solid, remove dead copper, pour order 10): 107.8,88.3 108.4,87.7 109.7,87.7 111.4,86 111.4,82.542 109.1,80.2 107.5,80.2 106.25,82.331 106.25,87.15
V3.3 on Bottom Layer "Top Layer-No Net" (solid, pour order 2): 93.175,75.525 95.875,75.525 95.875,75.125 93.65,75.125 93.575,75.3 93.425,75.125 93.05,75.425
VSS on Bottom Layer "Top Layer-No Net" (solid, remove dead copper, pour order 40): 86.7,91.3 86.7,90.03 90.6,86.13 90.6,80.1 90.6,79.319 92.907,77.012 93.29,77.396 93.29,77.7 95.4,77.7 95.302,77.798 95.302,88.302 95.9,88.9 99.9,88.9 99.9,89.6 100.8,90.5 100.8,93.5 99.9,94.4 99.9,95.4 97.2,95.4 96.7,95.9
VSS on Bottom Layer "Top Layer-No Net" (solid, remove dead copper, pour order 38): 86.1,91.9 86.1,104 106.1,104 106.1,100.9 104.3,100.7 104.3,98.5 101.2,95.4 96.5,95.4 92.4,91.3 87.1,91.3 87.1,91.9
GND on Bottom Layer "Top Layer-No Net" (solid, remove dead copper, pour order 4): 120.3,104 120.3,93.5 116.9,90.1 114.9,90.2 114.9,85.7 113.6,87 113.6,90.2 111.398,91.1 107.1,91.1 107.1,94.3 101.5,94.3 100.9,94.9 100.9,97 106.8,97 106.8,99 106.1,99.7 106.1,101.3 110.25,101.3 110.9,102 110.9,104 113.602,103.998 113.6,104
VSS on Top Layer "Top Layer-No Net" (solid, remove dead copper, pour order 12): 107.6,85.1 107.6,86 109.45,87.85 111.9,87.85 111.9,84.6 112,84.5 112.01,84.49 112.01,83.69 112.01,83.61 110,81.6 109.873,81.727 107.025,81.727 107.025,84.075 107,84.1
VSS on Top Layer "Top Layer-No Net" (solid, remove dead copper, pour order 18): 91.149,96.436 90.5,95.787 90.5,95 90.5,86.3 91.9,84.9 93.3,84.9 93.4,85 94,85.6 94,88.5 94.5,88.5 94.9,88.9 94.9,92.7 92.5,95.1
VSS on Top Layer "Top Layer-No Net" (solid, remove dead copper, pour order 32): 106.25,81.3 106.25,80.1 107.05,79.3 108.9,79.3 109.528,78.672 109.528,77.5 112,77.5 112.019,77.519 112.019,80.481 112.019,80.781 111.5,81.3 106.25,81.3
VSS on Top Layer "Top Layer-No Net" (solid, remove dead copper, pour order 34): 106.725,71.1 108.16,71.1 108.196,71.064 108.196,77.054 106.9,78.35 105.05,78.35 104.1,77.4 104.1,75.5 104.2,75.4 105.2,75.4 105.7,74.9 105.7,73.283 106.725,72.258
VIN on Top Layer "Top Layer-No Net" (solid, remove dead copper, pour order 50): 115.5,97.547 112.852,97.547 112.852,98.552 115.5,98.552 116.5,98.552 116.5,95.939 116.5,93.4 115.5,93.4 115.5,97.547
GND on Top Layer "Top Layer-No Net" (solid, remove dead copper, pour order 54): 107.2,69.8 118.1,69.8 118.1,76.9 107.2,76.9
VSS on Top Layer "Top Layer-No Net" (solid, remove dead copper, pour order 24): 89.6,96.106 89.494,96.106 89.6,96 89.6,85.45 89.85,85.2 89.85,82.2 90.15,81.9 91.1,81.9 91.3,82.1 93.15,82.1 93.15,79.3 94.028,79.3 94.7,78.628 93.923,77.851 93.923,76.635 92.688,75.4 92.688,73.271 96.104,72.221 98.5,69.8 91.9,69.8 91.9,70.9 89.3,70.875 87.9,72.3 87.9,74.2 88.385,74.74 88.385,82.335 88.75,82.7 88.75,84.3 88,84.3 88,92.4 87.4,93 87.4,94.5 89.3,96.4
VSS on Top Layer "Top Layer-No Net" (solid, remove dead copper, pour order 20): 102.2,87.6 96.202,87.6 93.8,90.002 101,89.9 101.958,88.958 104.804,88.958 104.887,88.875 105.987,89.975 113.141,89.975 115,88.116 115,89 117.8,89 118.475,89.675 118.795,89.675 119.7,88.77 119.7,84.96 118.84,84.1 112.4,84.1 110.65,85.85 108.35,85.85 107.4,84.9 104.9,84.9
VSS on Top Layer "Top Layer-No Net" (solid, remove dead copper, pour order 30): 110,81.754 111.2,81.754 cw(c111.2,80.481) 112.473,80.481 112.473,78.173 112.5,78.146 112.5,76.9 116,76.9 116,78.4 116.2,78.6 118.42,78.6 119.7,79.88 119.7,81.15 117.785,83.065 113.435,83.065 112.8,83.7 112,83.7
VSS on Top Layer "Top Layer-No Net" (solid, remove dead copper, pour order 36): 94.1,104 94.1,102.25 91.032,99.182 91.032,97.538 90.638,97.538 87.5,94.4 87.5,91.8 86.1,91.8 86.1,104
VSS on Top Layer "Top Layer-No Net" (solid, remove dead copper, pour order 14): 95.872,88.4 101.4,88.4 104.5,85.3 106.25,85.3 106.25,79.7 106.045,79.495 104.805,79.495 104.792,79.495 104.2,78.902 104.1,78.802 104.1,77.55 93.45,77.55 92.4,78.6 92.4,83 92.4,87.75 93.15,88.5 94.5,88.5 95.628,88.5 95.7,88.572
GND on Top Layer "Top Layer-No Net" (solid, remove dead copper, pour order 6): 100.9,95.8 98.6,98.1 98.05,98.1 98.05,99.125 104.1,99.1 107.54,103 107.5,104 120.3,104 120.3,93.5 119.7,92.9 119.7,88.77 117.3,91.2 114.053,91.3 113.3,90.5 104.4,88.6 104.4,92.3
VSS on Top Layer "Top Layer-No Net" (solid, remove dead copper, pour order 16): 99.93,103 99.9,104 107.75,104 107.725,102.7 104.7,99.7 103.4,99.5 97.95,99.55 97.95,98.1 96.8,97 98.5,97 103.7,91.8 103.7,90.65 95.722,90.65 94.672,89.6 91.972,92.3 91.972,95.475 90.912,96.534 91.657,97.279 91.657,98.615 94.442,101.4 94.77,103

## Other copper
Top Layer:
  rectangle net NetCONN1_1: 109.9,75.5 111.3,77.8
  rectangle net VEXT: 117.6,97.5 118.6,102.275
Bottom Layer:
  rectangle net NetC16_2: 96.1,78.9 97.1,79.3
  rectangle net NetC16_2: 96.4,78.6 97.1,78.9
  rectangle net NetC16_2: 96.1,79.3 97.1,79.5

## Silkscreen, mask and mechanical layers (free items; w line width, h text height)
Top Overlay:
  circle w0.25: c111.046,78.364 r0.125
  lines w0.15: 99.9,96.3 99.9,94.9 99.2,94.2 99.2,97 ; 101.5,96.3 101.5,94.9 102.2,94.2 102.2,97 ; 104.1,95.6 102.7,97 103.7,97 104.6,96.1 ; 104.6,95.1 105.5,94.2 106.5,94.2 105.1,95.6 ; 99.2,97 100.7,95.5 102.2,97 ; 99.2,97 100.1,97 100.7,96.4 101.3,97 102.2,97 ; 102.7,94.2 105.5,97 106.5,97 103.7,94.2 102.7,94.2
  lines w0.2: 107.696,72.714 107.696,74.914 ; 109.596,77.714 110.396,77.714 ; 114.896,77.714 115.696,77.714 ; 117.596,72.714 117.596,74.914
  text "DATA" at 95.8,100.5 h0.76
  text "EXT0" at 101,100.5 h0.76
  text "PWR" at 106.5,100.5 h0.76
  text "MegAxone" at 95.852,97.766 h3
  text ".net" at 106.852,97.766 h2
  text "3.3V" at 107.2,96 h0.76
  text "OW" at 111.3,90.5 h0.76
  text "Opioid" at 110.927,80.963 h3
  text "rev. A1" at 111.1,79.5 h1.5
  text "PWR" at 90.9,72.5 h0.76
  text "EXT1" at 95.7,72.5 h0.76
  text "DATA" at 100.6,72.5 h0.76
  text "USB" at 111.6,71.7 h0.76
Bottom Overlay:
  drawing of 949 lines, arcs and shapes, not listed
  text "RXD" at 95.1,101.5 h0.8 r90
  text "TXD" at 97.7,101.5 h0.8 r90
  text "IRQ" at 100.2,101.5 h0.8 r90
  text "-" at 115.194,101.272 h0.8 r180
  text "+" at 119.194,101.272 h0.8 r180
  text "Vext" at 118.2,100.5 h0.8
  text "SER" at 93.6,96.2 h2 r90
  text "30V max" at 119.456,93.978 h0.8
  text "GND" at 111.1,91.4 h0.76 r90
  text "VBUS" at 118.7,90.9 h0.8
  text "ID" at 88.871,90.878 h0.8
  text "IO 0" at 90.371,89.678 h0.8
  text "GND" at 118.7,89.7 h0.8
  text "1Wire" at 116.1,88.9 h0.8
  text "Vin" at 118.7,88.4 h0.8
  text "IO 1" at 90.371,88.378 h0.8
  text "VSS" at 114.9,87.5 h0.8
  text "VSS" at 118.7,87.1 h0.8
  text "IO 2" at 90.371,87.078 h0.8
  text "C18" at 110.875,86.825 h0.76
  text "V3.3" at 118.7,85.9 h0.8
  text "MISO" at 90.371,85.778 h0.8
  text "TXD" at 118.7,84.6 h0.8
  text "MOSI" at 90.371,84.578 h0.8
  text "OHW 1.0" at 112.7,84.5 h2.5 r90
  text "C17" at 108.1,83.9 h0.76
  text "RXD" at 118.6,83.4 h0.8
  text "SCK" at 89.771,83.278 h0.8
  text "SCK" at 118.6,82.1 h0.8
  text "RXD" at 89.771,81.978 h0.8
  text "MOSI" at 118.6,80.8 h0.8
  text "TXD" at 89.771,80.778 h0.8
  text "MISO" at 118.6,79.5 h0.8
  text "V3.3" at 90.371,79.478 h0.8
  text "IO 2" at 118.6,78.2 h0.8
  text "VSS" at 89.771,78.178 h0.8
  text "Vin" at 89.771,76.978 h0.8
  text "IO 1" at 118.6,77 h0.8
  text "ISCP" at 100.9,75.7 h0.8
  text "IO 0" at 118.6,75.7 h0.8
  text "GND" at 89.771,75.678 h0.8
  text "ID" at 118.6,74.4 h0.8
  text "VBUS" at 90.571,74.378 h0.8
  text "Vin" at 89.9,72 h0.8
  text "V3.3" at 93.2,72 h0.8
  text "VSS" at 96,72 h0.8
  text "IRQ" at 100.3,72 h0.8
  text "TXD" at 103,72 h0.8
  text "RXD" at 105.6,72 h0.8
Mechanical 13:
  lines w0.1: 106,85.675 106,87.125 108.2,87.125 108.2,85.675 106,85.675 ; 106.1,82.075 106.1,83.525 108.3,83.525 108.3,82.075 106.1,82.075
Mechanical 15:
  lines w0.1: 106.6,86.4 107.6,86.4 ; 106.7,82.8 107.7,82.8 ; 107.1,85.9 107.1,86.9 ; 107.2,82.3 107.2,83.3 ; 105.35,85.4 105.35,87.4 108.85,87.4 108.85,85.4 105.35,85.4 ; 105.45,81.8 105.45,83.8 108.95,83.8 108.95,81.8 105.45,81.8

## Dimensions
120.7,104.4 to 120.7,69.3 on Mechanical 1
90.15,102.112 to 85.7,104.4 on Mechanical 1
110,103 to 99.85,103 on Mechanical 1
121,69.3 to 119.7,74.8 on Mechanical 1
85.7,69.3 to 89.3,70.875 on Mechanical 1
89.3,70.875 to 99.45,70.875 on Mechanical 1
86.7,91.3 to 85.7,104.4 on Mechanical 1
85.7,104.4 to 90.15,102.112 on Mechanical 1
118.1,103 to 120.7,104.4 on Mechanical 1
85.7,104.4 to 120.7,104.4 on Mechanical 1
120.7,104.4 to 110,103 on Mechanical 1
120.7,104.4 to 118.1,103 on Mechanical 1
119.7,74.8 to 120.7,69.3 on Mechanical 1
86.7,74.79 to 85.7,69.3 on Mechanical 1
111.9,87.9 to 120.7,104.4 on Mechanical 1
111.9,89.17 to 120.7,104.4 on Mechanical 1
89.3,70.875 to 94.4,74.4 on Mechanical 1
94.4,74.4 to 85.7,69.3 on Mechanical 1
85.7,69.3 to 89.3,70.875 on Mechanical 1
88.8,97.9 to 85.7,104.4 on Mechanical 1
94.8,97.9 to 85.7,104.4 on Mechanical 1
108.375,95.475 to 110,103 on Mechanical 1
120.7,69.3 to 112.65,69 on Mechanical 1

## Text inside footprints (layer, text, board x,y; h text height)
C6: Top Overlay "+" at 110,99.8 h0.76 r270